# Altium PCB bms_afe-1_1.PcbDoc (part 2 of 2)
Units mm, origin at the board's own origin, x right, y up, seen from the top; angles counter-clockwise.
Board outline 368 x 57.35 mm, 4 copper layers (L1, L2, L3, L4), stack 1.586 mm thick; 218 components, 120 nets, 515 pads, 192 vias.
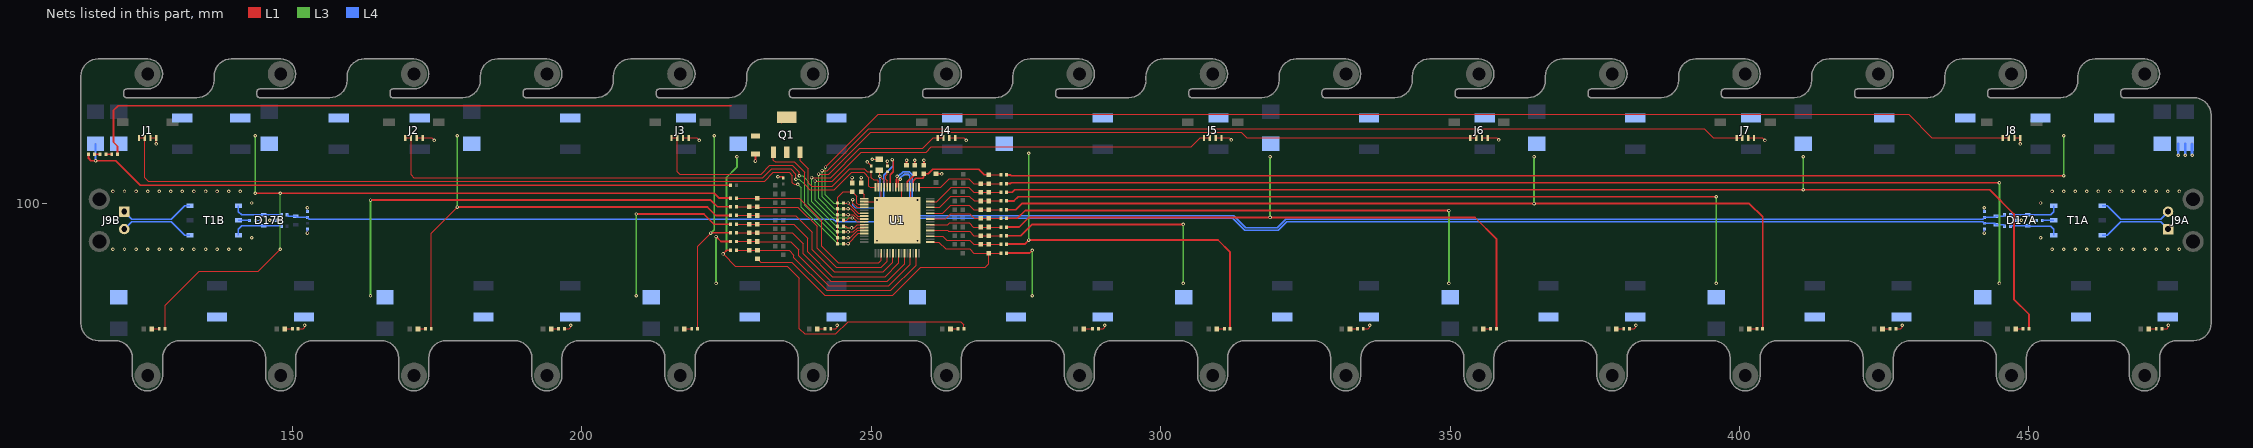
[diagram p4: the nets of this part, all layers, seen from the top]

## Via types
v1: diameter 0.6, hole 0.3, L1 to L4, 192 vias

## Nets (pads, with @x,y where several pads share a name; then routed paths per layer and width w, separated by ;. In a path a pad name is that pad's centre, name@x,y a point inside that pad or via, vN(x,y) a via of type N, cw(c..) or ccw(c..) an arc to the next point about the centre after c; other vN are vias at no path point) (continued)
COMH._P: C48B.1 R80B.1 R81B.2 U1.43 | length 119.6
  L1 w0.218: U1.43@253.25,102.7 253.291,102.741 253.291,104.882 253.8,105.391 253.8,107.4 253.7,107.5 v1(253.634,107.5)
  L4 w0.218: R80B.1@149.1,98 149.35,97.75 R81B.2@150.6,97.75 150.85,97.5 C48B.1@152.6,97.5 152.891,97.209 243.473,97.209 243.964,96.718 251.018,96.718 252.2,97.9 252.2,104.8 253.8,106.4 253.8,107.334 v1(253.634,107.5)
COML._N: C49A.1 R81A.1 R82A.1 U1.41 | length 202.1
  L1 w0.218: U1.41@254.25,102.7 254.291,102.741 254.291,103.982 254.441,104.132 254.441,104.332 254.47,104.36 v1(254.47,104.63)
  L4 w0.218: v1(254.47,104.63) 254.704,104.63 255.492,105.418 256.555,105.418 257.1,104.873 257.1,99 258.3,97.8 312.6,97.8 314.7,95.7 320.127,95.7 321.636,97.209 442.009,97.209 C49A.1@442.3,97.5 444.05,97.5 R81A.1@444.3,97.75 445.55,97.75 R82A.1@445.8,98
COML._P: C48A.1 R80A.1 R81A.2 U1.40 | length 201.3
  L1 w0.218: U1.40@254.75,102.7 254.709,102.741 254.709,103.809 v1(255,104.1)
  L4 w0.218: v1(255,104.1) 255,104.335 255.665,105 256.382,105 256.682,104.7 256.682,98.827 258.127,97.382 312.427,97.382 314.527,95.282 320.3,95.282 321.809,96.791 442.009,96.791 C48A.1@442.3,96.5 444.05,96.5 R81A.2@444.3,96.25 445.55,96.25 R80A.1@445.8,96
COMMA_N: J9A.2 T1A.4 | length 12.8
  L4 w0.218: T1A.4@462.691,99.54 463.56,99.54 465.891,97.209 472.744,97.209 J9A.2@474.035,98.5
COMMA_P: J9A.1 T1A.6 | length 12.8
  L4 w0.218: T1A.6@462.691,94.46 463.56,94.46 465.891,96.791 472.744,96.791 J9A.1@474.035,95.5
COMMB_N: J9B.2 T1B.4 | length 12.8
  L4 w0.218: J9B.2@120.965,95.5 122.256,96.791 129.109,96.791 131.44,94.46 T1B.4@132.309,94.46
COMMB_P: J9B.1 T1B.6 | length 12.8
  L4 w0.218: J9B.1@120.965,98.5 122.256,97.209 129.109,97.209 131.44,99.54 T1B.6@132.309,99.54
CVDD: C43.1 U1.45 U1.52 | length 17.5
  L1 w0.2: v1(246.8,100.6) 246.8,100 247.55,99.25 U1.52@248.8,99.25 ; C43.1@251.4,105.65 251.5,105.55 v1(251.5,104.6) 252.25,103.85 U1.45@252.25,102.7
  L4 w0.2: v1(246.8,100.6) 246.8,99.6 247.2,99.2 251.4,99.2 251.6,99.4 251.6,104.119 251.5,104.219 v1(251.5,104.6)
DVDD: C39.1 U1.49 | length 1.4
  L1 w0.2: C39.1@248.3,101.95 248.8,101.45 U1.49@248.8,100.75
FUSED0: F18.2 R77.1 R78.2 R79.1 | length 189.6
  L1 w0.3: R77.1@273.4,104.85 274.05,104.85 274.2,104.7 v1(456,104.7)
  L3 w0.3: v1(456,104.7) v1(456,111.6)
FUSED1: F17.2 R73.1 R74.1 R75.2 R76.1 | length 190.6
  L1 w0.2: R74.1@473,78.25 473.85,78.25 474.1,78.5 v1(474.1,78.9)
  L1 w0.3: R73.1@273.4,103.35 274.05,103.35 274.2,103.5 v1(444.9,103.5)
  L3 w0.3: v1(444.9,86.1) v1(444.9,103.5)
FUSED2: F16.2 R69.1 R70.1 R71.2 R72.1 | length 202.6
  L1 w0.3: R69.1@273.4,101.85 274.35,101.85 274.8,102.3 v1(411,102.3) 443.2,102.3 447.4,98.1 447.4,83.4 450,80.8 R70.1@450,78.25
  L3 w0.3: v1(411,102.3) v1(411,108)
FUSED3: F15.2 R61.1 R62.1 R66.2 R68.1 | length 139.5
  L1 w0.2: R62.1@427,78.25 427.85,78.25 428.1,78.5 v1(428.1,78.9)
  L1 w0.3: R61.1@273.4,100.35 274.65,100.35 275.4,101.1 v1(396,101.1)
  L3 w0.3: v1(396,86.1) v1(396,101.1)
FUSED4: F14.2 R57.1 R58.1 R59.2 R60.1 | length 159.4
  L1 w0.3: R57.1@273.4,98.85 274.95,98.85 276,99.9 v1(364.5,99.9) 401.7,99.9 404,97.6 R58.1@404,78.25
  L3 w0.3: v1(364.5,99.9) v1(364.5,108)
FUSED5: F13.2 R53.1 R54.1 R55.2 R56.1 | length 91.2
  L1 w0.2: R54.1@381,78.25 381.85,78.25 382.1,78.5 v1(382.1,78.9)
  L1 w0.3: R53.1@273.4,97.35 275.25,97.35 276.6,98.7 v1(349.8,98.7)
  L3 w0.3: v1(349.8,86.1) v1(349.8,98.7)
FUSED6: F12.2 R49.1 R50.1 R51.2 R52.1 | length 112.9
  L1 w0.3: R49.1@273.4,95.85 275.55,95.85 277.2,97.5 v1(318.9,97.5) 354.3,97.5 358,93.8 R50.1@358,78.25
  L3 w0.3: v1(318.9,97.5) v1(318.9,108)
FUSED7: F11.2 R45.1 R46.1 R47.2 R48.1 | length 43.1
  L1 w0.2: R46.1@335,78.25 335.85,78.25 336.1,78.5 v1(336.1,78.9)
  L1 w0.3: R45.1@273.4,94.35 275.85,94.35 277.8,96.3 v1(303.9,96.3)
  L3 w0.3: v1(303.9,86.1) v1(303.9,96.3)
FUSED8: F10.2 R33.1 R34.1 R39.2 R44.1 | length 68
  L1 w0.3: R33.1@273.4,92.9 276.5,92.9 v1(277.2,93.6) 309.9,93.6 312,91.5 R34.1@312,78.25
  L3 w0.3: v1(277.2,93.6) v1(277.2,108.6)
FUSED9: F9.2 R29.1 R30.1 R31.2 R32.1 | length 14
  L1 w0.2: R30.1@289.25,78.25 290.1,78.25 290.35,78.5 v1(290.35,78.9)
  L1 w0.3: R29.1@273.4,91.35 277.35,91.35 v1(277.8,91.8)
  L3 w0.3: v1(277.8,84) v1(277.8,91.8)
FUSED10: F8.2 R25.1 R26.1 R27.2 R28.1 | length 73.6
  L1 w0.2: v1(224.4,91.2) 226.5,89.1 235.5,89.1 237.6,87 237.6,78.3 238.5,77.4 243.9,77.4 246,79.5 265.5,79.5 266,79 R26.1@266,78.25
  L1 w0.3: v1(224.4,91.2) 225.05,91.85 R25.1@225.7,91.85
  L3 w0.3: v1(224.4,91.2) 225,91.8 225,104.4 226.8,106.2 v1(226.8,108)
FUSED11: F7.2 R21.1 R22.1 R23.2 R24.1 | length 12.6
  L1 w0.2: R22.1@243,78.25 243.85,78.25 244.1,78.5 v1(244.1,78.9)
  L1 w0.3: v1(223.2,94.2) 224.05,93.35 R21.1@225.7,93.35
  L3 w0.3: v1(223.2,86.1) v1(223.2,94.2)
FUSED12: F6.2 R17.1 R18.1 R19.2 R20.1 | length 38
  L1 w0.2: R18.1@220,78.25 220,92.5 v1(222.3,94.8)
  L1 w0.3: v1(222.3,94.8) 222.35,94.85 R17.1@225.7,94.85
  L3 w0.3: v1(222.3,94.8) 222.9,95.4 v1(222.9,111.6)
FUSED13: F5.2 R13.1 R14.1 R15.2 R16.1 | length 32.7
  L1 w0.2: R14.1@197,78.25 197.85,78.25 198.1,78.5 v1(198.1,78.9)
  L1 w0.3: v1(209.4,98.1) 221.1,98.1 222.85,96.35 R13.1@225.7,96.35
  L3 w0.3: v1(209.4,84) v1(209.4,98.1)
FUSED14: F4.2 R9.1 R10.1 R11.2 R12.1 | length 83
  L1 w0.2: R10.1@174,78.25 174,94.8 v1(178.5,99.3)
  L1 w0.3: v1(178.5,99.3) 221.7,99.3 223.15,97.85 R9.1@225.7,97.85
  L3 w0.3: v1(178.5,99.3) v1(178.5,111.6)
FUSED15: F3.2 R5.1 R6.1 R7.2 R8.1 | length 80.8
  L1 w0.2: R6.1@151,78.25 151.85,78.25 152.1,78.5 v1(152.1,78.9)
  L1 w0.3: v1(163.5,100.5) 222.3,100.5 223.45,99.35 R5.1@225.7,99.35
  L3 w0.3: v1(163.5,84) v1(163.5,100.5)
FUSED16: F2.2 R1.1 R2.1 R3.2 R4.1 | length 130
  L1 w0.2: R2.1@128,78.25 128,82.3 133.9,88.2 144.1,88.2 v1(147.9,92)
  L1 w0.3: v1(143.6,101.7) v1(147.9,101.7) 222.9,101.7 223.75,100.85 R1.1@225.7,100.85
  L3 w0.2: v1(147.9,92) v1(147.9,101.7)
  L3 w0.3: v1(143.6,101.7) v1(143.6,111.6)
GND: C18.2 C31.2 C32.2 C34.2 C36.2 C39.2 C40.2 C41.2 C42.2 C43.2 C44.2 C45A.2 C45B.2 C48A.2 C48B.2 C49A.2 C49B.2 D17A.3 D17B.3 F19.2 J1.1 J1.2 J2.1 J2.2 J3.1 J3.2 J4.1 J4.2 J5.1 J5.2 J6.1 J6.2 J7.1 J7.2 J8.1 J8.2 U1.36 U1.39 U1.46 U1.50 U1.EP0 | length 52.5
  L1 w0.2: J1.2@125.5,111.25 J1.1@126.5,111.25 v1(126.5,110.2) ; J2.2@171.5,111.25 J2.1@172.5,111.25 174.05,111.25 v1(174.5,110.8) ; J3.2@217.5,111.25 J3.1@218.5,111.25 219.85,111.25 v1(220.3,110.8) ; C18.2@246.7,103.45 v1(246.7,104.4) ; C39.2@248.3,103.45 v1(248.3,104.4) ; U1.50@248.8,100.25 U1.EP0@250.65,100.25 ; v1(249.3,107.1) C34.2@250,106.4 ; v1(250.189,107.554) 250.193,107.55 C43.2@251.4,107.55 ; U1.EP0@251.75,100.85 U1.46@251.75,102.7 ; C41.2@252.8,106.4 v1(252.8,107.2) ; U1.EP0@255.25,100.9 U1.39@255.25,102.7 ; U1.36@256.75,102.7 256.8,102.65 U1.EP0@256.8,100.9 ; J4.2@263.5,111.25 J4.1@264.5,111.25 265.95,111.25 v1(266.4,110.8) ; J5.2@309.5,111.25 J5.1@310.5,111.25 311.85,111.25 v1(312.2,110.9) ; J6.2@355.5,111.25 J6.1@356.5,111.25 358.05,111.25 v1(358.4,110.9) ; J7.2@401.5,111.25 J7.1@402.5,111.25 403.95,111.25 v1(404.4,110.8) ; J8.2@447.5,111.25 J8.1@448.5,111.25 v1(448.5,110.2)
  L1 w0.3: v1(230,107.25) C31.2@230,108.45 ; v1(233.882,104.538) 233.893,104.55 234.8,104.55 ; C40.2@256.1,106.55 v1(256.1,107.4) ; C36.2@257.5,106.55 v1(257.5,107.4) ; C42.2@259.1,106.55 v1(259.1,107.4) ; C44.2@261.2,105.05 262.142,105.05 v1(262.162,105.03)
  L4 w0.2: C45B.2@143.6,97 v1(144.5,97) ; v1(152.6,94.8) C49B.2@152.6,95.5 ; C48B.2@152.6,98.5 v1(152.6,99.2) ; v1(442.3,94.8) C48A.2@442.3,95.5 ; C49A.2@442.3,98.5 v1(442.3,99.2) ; v1(450.5,97) C45A.2@451.3,97
  L4 w0.3: v1(146.1,97) D17B.3@147.125,97 ; D17A.3@447.775,97 v1(448.7,97)
  L4 w0.5: v1(475.8,108.25) F19.2@475.8,110.2 ; v1(477,108.25) F19.2@477,110.2 ; v1(478.2,108.25) F19.2@478.2,110.2
  other v1: 119,92 121,92 123,92 125,92 127,92 129,92 131,92 133,92 135,92 137,92 139,92 141,92 454,92 456,92 458,92 460,92 462,92 464,92 466,92 468,92 470,92 472,92 474,92 476,92 251,93.5 258,93.5 143,94 452,94 254.5,97 143,100 452,100 251,100.5 258,100.5 119,102 121,102 123,102 125,102 127,102 129,102 131,102 133,102 135,102 137,102 139,102 141,102 454,102 456,102 458,102 460,102 462,102 464,102 466,102 468,102 470,102 472,102 474,102 476,102
GPIO1: J1.3 J1.4 R35.2 U1.61 | length 142.3
  L1 w0.2: J1.4@123.5,111.25 J1.3@124.5,111.25 124.5,104.4 125.1,103.8 231.6,103.8 233.1,105.3 235.8,105.3 236.4,104.7 236.4,103.5 236.7,103.2 v1(237.3,103.2) ; R35.2@245.2,93 v1(246,93) 247.75,94.75 U1.61@248.8,94.75
  L3 w0.2: v1(237.3,103.2) 237.9,102.6 237.9,99.3 244.2,93 v1(246,93)
GPIO2: J2.3 J2.4 R40.2 U1.60 | length 95.4
  L1 w0.2: J2.4@169.5,111.25 J2.3@170.5,111.25 170.5,104.9 171,104.4 231.3,104.4 232.8,105.9 236.1,105.9 237,105 v1(237,104.1) ; R40.2@245.2,94 v1(246,94) 246.4,94 247.65,95.25 U1.60@248.8,95.25
  L3 w0.2: v1(237,104.1) 237.6,104.1 238.5,103.2 238.5,99.6 244.1,94 v1(246,94)
GPIO3: J3.3 J3.4 R36.2 U1.59 | length 48.5
  L1 w0.2: J3.4@215.5,111.25 J3.3@216.5,111.25 216.5,105.4 216.9,105 231,105 232.5,106.5 236.4,106.5 237.6,105.3 v1(237.6,104.7) ; R36.2@245.2,95 v1@245.991,95 ; v1(246,95) v1@245.991,95 ; U1.59@248.8,95.75 247.65,95.75 246.9,95 v1@245.991,95
  L3 w0.2: v1(237.6,104.7) 238.2,104.7 239.1,103.8 239.1,99.9 244,95 v1(246,95)
GPIO4: J4.3 J4.4 R41.2 U1.58 | length 42.6
  L1 w0.2: v1(239.7,104.4) 243,104.4 248.05,109.45 258.9,109.45 260.7,111.25 J4.4@261.5,111.25 J4.3@262.5,111.25 ; R41.2@245.2,96 245.6,96 245.9,95.7 v1(246.6,95.7) 247.05,95.7 247.6,96.25 U1.58@248.8,96.25
  L3 w0.2: v1(239.7,104.4) 239.7,100.2 244.2,95.7 v1(246.6,95.7)
GPIO5: J5.3 J5.4 R37.2 U1.57 | length 86.4
  L1 w0.2: v1(240.3,103.8) 243.3,103.8 248.3,108.8 259.5,108.8 260.4,109.7 305.3,109.7 306.85,111.25 J5.3@308.5,111.25 ; R37.2@245.2,97 245.8,97 246.211,97.411 v1(246.711,97.411) 246.8,97.5 246.85,97.5 247.6,96.75 U1.57@248.8,96.75
  L3 w0.2: v1(240.3,103.8) 240.3,100.5 243.389,97.411 v1(246.711,97.411)
GPIO6: J6.3 J6.4 R42.2 U1.56 | length 131.4
  L1 w0.2: v1(240.9,105) 242.7,105 249.9,112.2 313.9,112.2 314.85,111.25 J6.4@353.5,111.25 J6.3@354.5,111.25 ; R42.2@245.2,98 v1@246.05,98 ; v1(246,98) v1@246.05,98 ; U1.56@248.8,97.25 247.65,97.25 246.9,98 v1@246.05,98
  L3 w0.2: v1(240.9,105) 240.9,100.8 243.7,98 v1(246,98)
GPIO7: J7.3 J7.4 R38.2 U1.55 | length 176.6
  L1 w0.2: v1(241.5,105.6) 242.4,105.6 249.6,112.8 393.9,112.8 395.45,111.25 J7.4@399.5,111.25 J7.3@400.5,111.25 ; R38.2@245.2,99 v1(246,99) 246.45,99 247.7,97.75 U1.55@248.8,97.75
  L3 w0.2: v1(241.5,105.6) 241.5,101.1 243.6,99 v1(246,99)
GPIO8: J8.3 J8.4 R43.2 U1.54 | length 223.5
  L1 w0.2: v1(242.1,106.2) 251.2,115.3 429.2,115.3 433.25,111.25 J8.4@445.5,111.25 J8.3@446.5,111.25 ; R43.2@245.2,100 v1(246,100) 247.75,98.25 U1.54@248.8,98.25
  L3 w0.2: v1(242.1,106.2) 242.1,101.4 243.5,100 v1(246,100)
LDOIN: C34.1 Q1.3 U1.47 | length 22
  L1 w0.2: Q1.3@237.7,108.8 237.7,107.3 239.1,105.9 239.1,103.5 239.7,102.9 243.3,102.9 246.3,105.9 248.8,105.9 249.3,105.4 C34.1@250,105.4 250,104.4 250.4,104 251,104 251.25,103.75 U1.47@251.25,102.7
NEG5V: C41.1 U1.44 | length 2.9
  L1 w0.2: U1.44@252.75,102.7 252.75,103.85 252.5,104.1 252.5,104.7 252.8,105 C41.1@252.8,105.4
NetC45A_1: C45A.1 T1A.2 | length 2
  L4 w0.218: C45A.1@452.3,97 T1A.2@454.309,97
NetC45B_1: C45B.1 T1B.2 | length 1.9
  L4 w0.218: T1B.2@140.691,97 C45B.1@142.6,97
NetD1_1: D1.1 R2.2 | length 1.3
  L1 w0.2: D1.1@125.7,78.25 R2.2@127,78.25
NetD2_1: D2.1 R6.2 | length 1.3
  L1 w0.2: D2.1@148.7,78.25 R6.2@150,78.25
NetD3_1: D3.1 R10.2 | length 1.3
  L1 w0.2: D3.1@171.7,78.25 R10.2@173,78.25
NetD4_1: D4.1 R14.2 | length 1.3
  L1 w0.2: D4.1@194.7,78.25 R14.2@196,78.25
NetD5_1: D5.1 R18.2 | length 1.3
  L1 w0.2: D5.1@217.7,78.25 R18.2@219,78.25
NetD6_1: D6.1 R22.2 | length 1.3
  L1 w0.2: D6.1@240.7,78.25 R22.2@242,78.25
NetD7_1: D7.1 R26.2 | length 1.3
  L1 w0.2: D7.1@263.7,78.25 R26.2@265,78.25
NetD8_1: D8.1 R30.2 | length 1.6
  L1 w0.2: D8.1@286.7,78.25 R30.2@288.25,78.25
NetD9_1: D9.1 R34.2 | length 1.3
  L1 w0.2: D9.1@309.7,78.25 R34.2@311,78.25
NetD10_1: D10.1 R46.2 | length 1.3
  L1 w0.2: D10.1@332.7,78.25 R46.2@334,78.25
NetD11_1: D11.1 R50.2 | length 1.3
  L1 w0.2: D11.1@355.7,78.25 R50.2@357,78.25
NetD12_1: D12.1 R54.2 | length 1.3
  L1 w0.2: D12.1@378.7,78.25 R54.2@380,78.25
NetD13_1: D13.1 R58.2 | length 1.3
  L1 w0.2: D13.1@401.7,78.25 R58.2@403,78.25
NetD14_1: D14.1 R62.2 | length 1.3
  L1 w0.2: D14.1@424.7,78.25 R62.2@426,78.25
NetD15_1: D15.1 R70.2 | length 1.3
  L1 w0.2: D15.1@447.7,78.25 R70.2@449,78.25
NetD16_1: D16.1 R74.2 | length 1.3
  L1 w0.2: D16.1@470.7,78.25 R74.2@472,78.25
NetD17A_1: D17A.1 R82A.2 T1A.3 | length 8.8
  L4 w0.218: R82A.2@446.8,98 446.85,97.95 D17A.1@449.825,97.95 453.75,97.95 454.309,98.509 T1A.3@454.309,99.54
NetD17A_2: D17A.2 R80A.2 T1A.1 | length 8.8
  L4 w0.218: R80A.2@446.8,96 446.85,96.05 D17A.2@449.825,96.05 449.875,96 453.8,96 454.309,95.491 T1A.1@454.309,94.46
NetD17B_1: D17B.1 R82B.2 T1B.3 | length 8.7
  L4 w0.218: T1B.3@140.691,94.46 140.691,95.491 141.25,96.05 D17B.1@145.075,96.05 148.05,96.05 R82B.2@148.1,96
NetD17B_2: D17B.2 R80B.2 T1B.1 | length 8.7
  L4 w0.218: T1B.1@140.691,99.54 140.691,98.509 141.25,97.95 D17B.2@145.075,97.95 148.05,97.95 R80B.2@148.1,98
NetF1_2: F1.2 R63.2 R67.1 | length 116.5
  L1 w0.3: R63.2@114.8,108.4 114.8,107.7 115.2,107.3 v1(116,107.3) 119.5,107.3 123.75,103.05 R67.1@225.7,103.05
  L4 w0.3: v1(116,107.3) F1.2@116,110.25
NetR63_1: R63.1 R64.2 | length 1
  L1 w0.3: R63.1@115.8,108.4 R64.2@116.8,108.4
NetR64_1: R64.1 R65.2 | length 1
  L1 w0.3: R64.1@117.8,108.4 R65.2@118.8,108.4
NPNB: Q1.1 U1.48 | length 25.6
  L1 w0.2: Q1.1@233.1,108.8 233.1,107.4 233.4,107.1 236.7,107.1 238.5,105.3 238.5,103.2 239.4,102.3 243.6,102.3 246.6,105.3 248.7,105.3 249.6,104.4 249.6,102.9 249.8,102.7 U1.48@250.75,102.7
NPNC: C31.1 Q1.2 Q1.4 R65.1 | length 116.2
  L1 w0.3: R65.1@119.8,108.4 119.8,109.8 119.1,110.5 119.1,116 119.9,116.8 225.8,116.8 ; Q1.4@234.5,113.9 Q1.4@235.4,114.8
REFHP: C36.1 U1.37 | length 2.9
  L1 w0.218: U1.37@256.25,102.7 256.25,103.65 257.5,104.9 C36.1@257.5,105.05
TSREF: C18.1 R35.1 R36.1 R37.1 R38.1 R40.1 R41.1 R42.1 R43.1 U1.51 | length 14.6
  L1 w0.2: R35.1@244.2,93 R40.1@244.2,94 R36.1@244.2,95 R41.1@244.2,96 R37.1@244.2,97 R42.1@244.2,98 R38.1@244.2,99 R43.1@244.2,100 244.2,101 245.15,101.95 C18.1@246.7,101.95 247.5,101.15 247.5,100 247.75,99.75 U1.51@248.8,99.75
VC0: C37.2 C42.1 R77.2 U1.35 | length 17.8
  L1 w0.2: C37.2@270.3,104.85 R77.2@272.4,104.85
  L1 w0.218: U1.35@257.25,102.7 257.25,103.85 257.709,104.309 258.909,104.309 259.1,104.5 C42.1@259.1,105.05 259.85,105.05 260.6,105.8 268.6,105.8 269.55,104.85 C37.2@270.3,104.85
VC1: C33.2 C37.1 R73.2 U1.33 | length 15.1
  L1 w0.2: U1.33@258.25,102.7 262,102.7 263.5,104.2 266.85,104.2 267.7,103.35 C33.2@268.9,103.35 C37.1@270.3,103.35 R73.2@272.4,103.35
VC2: C28.2 C33.1 R69.2 U1.31 | length 13.6
  L1 w0.2: U1.31@260.2,100.25 261.35,100.25 263.8,102.7 266.85,102.7 267.7,101.85 C33.1@268.9,101.85 C28.2@270.3,101.85 R69.2@272.4,101.85
VC3: C26.2 C28.1 R61.2 U1.29 | length 13.4
  L1 w0.2: U1.29@260.2,99.25 261.8,99.25 263.75,101.2 266.95,101.2 267.8,100.35 C26.2@268.9,100.35 C28.1@270.3,100.35 R61.2@272.4,100.35
VC4: C24.2 C26.1 R57.2 U1.27 | length 13.1
  L1 w0.2: U1.27@260.2,98.25 262.35,98.25 263.7,99.6 266.95,99.6 267.7,98.85 C26.1@268.9,98.85 C24.2@270.3,98.85 R57.2@272.4,98.85
VC5: C22.2 C24.1 R53.2 U1.25 | length 12.9
  L1 w0.2: U1.25@260.2,97.25 262.85,97.25 263.7,98.1 267.05,98.1 267.8,97.35 C22.2@268.9,97.35 C24.1@270.3,97.35 R53.2@272.4,97.35
VC6: C20.2 C22.1 R49.2 U1.23 | length 12.7
  L1 w0.2: U1.23@260.2,96.25 263.25,96.25 263.6,96.6 266.9,96.6 267.65,95.85 C22.1@268.9,95.85 C20.2@270.3,95.85 R49.2@272.4,95.85
VC7: C17.2 C20.1 R45.2 U1.21 | length 12.6
  L1 w0.2: U1.21@260.2,95.25 263.2,95.25 263.35,95.1 267,95.1 267.75,94.35 C17.2@268.9,94.35 C20.1@270.3,94.35 R45.2@272.4,94.35
VC8: C15.2 C17.1 R33.2 U1.19 | length 12.8
  L1 w0.2: U1.19@260.2,94.25 262.4,94.25 263.05,93.6 267,93.6 267.75,92.85 C17.1@268.9,92.85 C15.2@270.3,92.85 270.35,92.9 R33.2@272.4,92.9
VC9: C13.2 C15.1 R29.2 U1.17 | length 59.6
  L1 w0.2: C13.2@230.35,90.35 230.9,89.8 236.278,89.8 241.978,84.1 253.723,84.1 258.523,88.9 269.7,88.9 270.3,89.5 C15.1@270.3,91.35 ; U1.17@260.2,93.25 261.7,93.25 262.85,92.1 267,92.1 267.75,91.35 C15.1@270.3,91.35 ; R29.2@272.4,91.35 C15.1@270.3,91.35
VC10: C11.2 C13.1 R25.2 U1.15 | length 38
  L1 w0.2: R25.2@226.7,91.85 C11.2@228.9,91.85 228.95,91.8 230.35,91.8 235.8,91.8 236.65,90.95 236.65,90.56 242.31,84.9 253.391,84.9 257.75,89.259 U1.15@257.75,91.3
VC11: C9.2 C11.1 R21.2 U1.13 | length 37.3
  L1 w0.2: R21.2@226.7,93.35 C11.1@228.9,93.35 C9.2@230.3,93.35 230.35,93.3 236.1,93.3 237.45,91.95 237.45,90.891 242.641,85.7 253.06,85.7 256.75,89.39 U1.13@256.75,91.3
VC12: C7.2 C9.1 R17.2 U1.11 | length 36.6
  L1 w0.2: R17.2@226.7,94.85 C7.2@228.9,94.85 C9.1@230.3,94.85 236.35,94.85 238.25,92.95 238.25,91.222 242.972,86.5 252.728,86.5 255.75,89.522 U1.11@255.75,91.3
VC13: C5.2 C7.1 R13.2 U1.9 | length 35.8
  L1 w0.2: R13.2@226.7,96.35 C7.1@228.9,96.35 C5.2@230.3,96.35 236.65,96.35 239.05,93.95 239.05,91.554 243.304,87.3 252.397,87.3 254.75,89.653 U1.9@254.75,91.3
VC14: C3.2 C5.1 R9.2 U1.7 | length 35.1
  L1 w0.2: R9.2@226.7,97.85 C3.2@228.9,97.85 C5.1@230.3,97.85 230.35,97.8 237,97.8 239.85,94.95 239.85,91.885 243.635,88.1 252.066,88.1 253.75,89.784 U1.7@253.75,91.3
VC15: C1.2 C3.1 R5.2 U1.5 | length 34.4
  L1 w0.2: R5.2@226.7,99.35 C3.1@228.9,99.35 C1.2@230.3,99.35 230.35,99.3 237.3,99.3 240.65,95.95 240.65,92.217 243.967,88.9 251.7,88.9 252.75,89.95 U1.5@252.75,91.3
VC16: C1.1 R1.2 U1.3 | length 33.6
  L1 w0.2: R1.2@226.7,100.85 C1.1@230.3,100.85 230.35,100.8 237.6,100.8 241.45,96.95 241.45,92.548 244.298,89.7 251.3,89.7 251.75,90.15 U1.3@251.75,91.3
pads on no net: J1.EP0 J1.EP1 J2.EP0 J2.EP1 J3.EP0 J3.EP1 J4.EP0 J4.EP1 J5.EP0 J5.EP1 J6.EP0 J6.EP1 J7.EP0 J7.EP1 J8.EP0 J8.EP1 J9A.3 J9A.4 J9B.3 J9B.4 T1A.5 T1B.5 U1.53 U1.62 U1.63 U1.64

## Polygon pours and split planes (outlines as drawn)
CB16 on L4 "NONET_L04_P-001" (solid, remove dead copper, pour order 99): 144,110.5 144,102.5 113.515,102.5 113.515,107 129,107 129,110.5
CB15 on L4 "NONET_L04_P-001" (solid, remove dead copper, pour order 79): 135,85 135,87 113.515,87 113.515,91.5 144.033,91.5 144.039,94.5 164,94.5 164,85
CB1 on L4 "NONET_L04_P-001" (solid, remove dead copper, pour order 63): 440.5,87 440.5,94.5 451.543,94.5 451.543,91.5 480.5,91.5 480.5,85 457,85 457,87
CB0 on L4 "NONET_L04_P-001" (solid, remove dead copper, pour order 61): 442,110.5 465,110.5 465,107 480.397,107 480.397,102.5 451.543,102.5 451.543,99.5 442,99.5
CELL0 on L4 "CELL0_L04_P059" (solid, remove dead copper, pour order 59): 478.469,124.895 455.7,124.895 455.7,116.5 478.469,116.5
CELL16 on L4 "CELL16_L04_P058" (solid, remove dead copper, pour order 58): 127.615,124.895 113.469,124.895 113.469,116.5 127.615,116.5
CELL14 on L4 "CELL14_L04_P057" (solid, remove dead copper, pour order 57): 173.615,124.895 133.635,124.895 133.635,116.5 173.615,116.5
CELL12 on L4 "CELL12_L04_P056" (solid, remove dead copper, pour order 56): 219.615,124.895 179.635,124.895 179.635,116.5 219.615,116.5
CELL10 on L4 "CELL10_L04_P055" (solid, remove dead copper, pour order 55): 265.615,124.895 225.635,124.895 225.635,116.5 265.615,116.5
CELL8 on L4 "CELL8_L04_P054" (solid, remove dead copper, pour order 54): 311.615,124.895 271.635,124.895 271.635,116.5 311.615,116.5
CELL6 on L4 "CELL6_L04_P053" (solid, remove dead copper, pour order 53): 357.615,124.895 317.635,124.895 317.635,116.5 357.615,116.5
CELL4 on L4 "CELL4_L04_P052" (solid, remove dead copper, pour order 52): 403.6,124.895 363.62,124.895 363.62,116.5 403.6,116.5
CELL2 on L4 "CELL2_L04_P051" (solid, remove dead copper, pour order 51): 449.615,124.895 409.635,124.895 409.635,116.5 449.615,116.5
CELL1 on L4 "CELL1_L04_P050" (solid, remove dead copper, pour order 50): 476,78 441,78 441,67.499 476,67.499
CELL3 on L4 "CELL3_L04_P049" (solid, remove dead copper, pour order 49): 430,78 395,78 395,67.499 430,67.499
CELL5 on L4 "CELL5_L04_P048" (solid, remove dead copper, pour order 48): 384,78 349,78 349,67.499 384,67.499
CELL7 on L4 "CELL7_L04_P047" (solid, remove dead copper, pour order 47): 338,78 303,78 303,67.499 338,67.499
CELL9 on L4 "CELL9_L04_P046" (solid, remove dead copper, pour order 46): 292,78 257,78 257,67.499 292,67.499
CELL11 on L4 "CELL11_L04_P045" (solid, remove dead copper, pour order 45): 246,78 211,78 211,67.499 246,67.499
CELL13 on L4 "CELL13_L04_P044" (solid, remove dead copper, pour order 44): 200,78 165,78 165,67.499 200,67.499
CELL15 on L4 "CELL15_L04_P017" (solid, remove dead copper, pour order 17): 154,78 119,78 119,67.499 154,67.499
FUSED0 on L4 "NONET_L04_P-001" (solid, remove dead copper, pour order 60): 474.5,114 471,114 471,116 442,116 442,111 465.5,111 465.5,107.5 474.5,107.5
CB10 on L4 "NONET_L04_P-001" (solid, remove dead copper, pour order 91): 240.476,110.5 240.476,107 225.5,107 225.5,99.5 271,99.5 271,110.5
CB4 on L4 "NONET_L04_P-001" (solid, remove dead copper, pour order 81): 380,110.5 380,107 363.5,107 363.5,99.5 409,99.5 409,110.5
FUSED4 on L4 "NONET_L04_P-001" (solid, remove dead copper, pour order 80): 363.5,114 363.5,107.5 379.495,107.5 379.495,111 409,111 409,116 367,116 367,114
CB6 on L4 "NONET_L04_P-001" (solid, remove dead copper, pour order 83): 334,110.5 334,107 317.5,107 317.5,99.5 363,99.5 363,110.5
FUSED6 on L4 "NONET_L04_P-001" (solid, remove dead copper, pour order 82): 317.5,114 317.5,107.5 333.495,107.5 333.495,111 363,111 363,116 321,116 321,114
CB8 on L4 "NONET_L04_P-001" (solid, remove dead copper, pour order 93): 288,110.5 288,107 271.5,107 271.5,99.5 317,99.5 317,110.5
FUSED8 on L4 "NONET_L04_P-001" (solid, remove dead copper, pour order 92): 271.5,114 271.5,107.5 287.495,107.5 287.495,111 317,111 317,116 275,116 275,114
FUSED10 on L4 "NONET_L04_P-001" (solid, remove dead copper, pour order 90): 225.5,114 225.5,107.5 239.969,107.5 239.969,111 271,111 271,116 229,116 229,114
FUSED16 on L4 "NONET_L04_P-001" (solid, remove dead copper, pour order 98): 118.5,114 122,114 122,116 144,116 144,111 128.5,111 128.5,107.5 118.5,107.5
CB14 on L4 "NONET_L04_P-001" (solid, remove dead copper, pour order 97): 156,110.5 156,107 144.5,107 144.5,99.5 179,99.5 179,110.5
FUSED14 on L4 "NONET_L04_P-001" (solid, remove dead copper, pour order 96): 144.5,114 144.5,107.5 155.5,107.5 155.5,111 179,111 179,116 148,116 148,114
CB12 on L4 "NONET_L04_P-001" (solid, remove dead copper, pour order 95): 196,110.5 196,107 179.5,107 179.5,99.5 225,99.5 225,110.5
FUSED12 on L4 "NONET_L04_P-001" (solid, remove dead copper, pour order 94): 179.5,114 179.5,107.5 195.495,107.5 195.495,111 225,111 225,116 183,116 183,114
CB2 on L4 "NONET_L04_P-001" (solid, remove dead copper, pour order 65): 423,110.5 441.5,110.5 441.5,99.5 409.5,99.5 409.5,107 423,107
CB11 on L4 "NONET_L04_P-001" (solid, remove dead copper, pour order 75): 227,85 227,87 210.5,87 210.5,94.5 256,94.5 256,85
FUSED2 on L4 "NONET_L04_P-001" (solid, remove dead copper, pour order 64): 409.5,114 409.5,107.5 422.5,107.5 422.5,111 441.5,111 441.5,116 413,116 413,114
FUSED15 on L4 "NONET_L04_P-001" (solid, remove dead copper, pour order 78): 113.515,80 113.515,86.5 134.495,86.5 134.495,84.5 164,84.5 164,78.5 122,78.5 122,80
CB13 on L4 "NONET_L04_P-001" (solid, remove dead copper, pour order 77): 181,85 181,87 164.5,87 164.5,94.5 210,94.5 210,85
FUSED13 on L4 "NONET_L04_P-001" (solid, remove dead copper, pour order 76): 164.5,80 164.5,86.5 180.495,86.5 180.495,84.5 210,84.5 210,78.5 168,78.5 168,80
FUSED11 on L4 "NONET_L04_P-001" (solid, remove dead copper, pour order 74): 210.5,80 210.5,86.5 226.495,86.5 226.495,84.5 256,84.5 256,78.5 214,78.5 214,80
CB9 on L4 "NONET_L04_P-001" (solid, remove dead copper, pour order 73): 273,85 273,87 256.5,87 256.5,94.5 302,94.5 302,85
FUSED9 on L4 "NONET_L04_P-001" (solid, remove dead copper, pour order 72): 256.5,80 256.5,86.5 272.495,86.5 272.495,84.5 302,84.5 302,78.5 260,78.5 260,80
CB7 on L4 "NONET_L04_P-001" (solid, remove dead copper, pour order 71): 319,85 319,87 302.5,87 302.5,94.5 348,94.5 348,85
FUSED7 on L4 "NONET_L04_P-001" (solid, remove dead copper, pour order 70): 302.5,80 302.5,86.5 318.495,86.5 318.495,84.5 348,84.5 348,78.5 306,78.5 306,80
CB5 on L4 "NONET_L04_P-001" (solid, remove dead copper, pour order 69): 365,85 365,87 348.5,87 348.5,94.5 394,94.5 394,85
FUSED5 on L4 "NONET_L04_P-001" (solid, remove dead copper, pour order 68): 348.5,80 348.5,86.5 364.495,86.5 364.495,84.5 394,84.5 394,78.5 352,78.5 352,80
CB3 on L4 "NONET_L04_P-001" (solid, remove dead copper, pour order 67): 411,85 411,87 394.5,87 394.5,94.5 440,94.5 440,85
FUSED3 on L4 "NONET_L04_P-001" (solid, remove dead copper, pour order 66): 394.5,80 394.5,86.5 410.495,86.5 410.495,84.5 440,84.5 440,78.5 398,78.5 398,80
FUSED1 on L4 "NONET_L04_P-001" (solid, remove dead copper, pour order 62): 440.5,80 440.5,86.5 456.5,86.5 456.5,84.5 480.5,84.5 480.5,78.5 444,78.5 444,80
NPNC on L1 "NPNC_L01_P101" (solid, remove dead copper, pour order 101): 225.5,109.5 231.5,109.5 231.5,110.5 234.5,110.5 234.5,107.5 236.5,107.5 236.5,110.5 245.5,110.5 245.5,118 225.5,118
GND on L2 "NONET_L04_P-001" (solid, remove dead copper, pour order 100): 113.535,118.233 113.509,101.539 140.507,101.485 140.493,92.5 113.475,92.5 113.469,76.2 481.469,76.2 481.469,92.5 454.496,92.5 454.464,101.485 481.469,101.485 481.469,118.2
GND on L3 "NONET_L04_P-001" (solid, remove dead copper, pour order 102): 113.535,118.233 113.509,101.539 140.507,101.485 140.493,92.5 113.475,92.5 113.469,76.2 481.469,76.2 481.469,92.5 454.496,92.5 454.464,101.485 481.469,101.485 481.469,118.2

## Silkscreen, mask and mechanical layers (free items; w line width, h text height)
Top Overlay:
  text "COMM_P" at 122.7,98.067 h1
  text "COMM_N" at 466.7,98.067 h1
  text "COMM_N" at 122.7,95.067 h1
  text "COMM_P" at 466.7,95.067 h1
  text "bms_afe-1_1 / Sasha Zbrozek - zbrozek@zlnp.net / JLC04161H-7628 stackup" at 163,90 h1.52
  text "Cell 15" at 120.254,79.254 h1.52
  text "Cell 14" at 144.254,79.254 h1.52
  text "Cell 13" at 167.254,79.254 h1.52
  text "Cell 12" at 190.254,79.254 h1.52
  text "Cell 11" at 213.254,79.254 h1.52
  text "Cell 10" at 236.254,79.254 h1.52
  text "Cell 9" at 259.254,79.254 h1.52
  text "Cell 8" at 282.254,79.254 h1.52
  text "Cell 7" at 305.254,79.254 h1.52
  text "Cell 6" at 329.254,79.254 h1.52
  text "Cell 5" at 351.254,79.254 h1.52
  text "Cell 4" at 374.254,79.254 h1.52
  text "Cell 3" at 397.254,79.254 h1.52
  text "Cell 2" at 420.254,79.254 h1.52
  text "Cell 1" at 443.254,79.254 h1.52
  text "Cell 0" at 466.254,79.254 h1.52
Bottom Overlay:
  text "COMM_P" at 128.335,98.067 h1
  text "COMM_N" at 472.335,98.067 h1
  text "COMM_N" at 128.335,95.067 h1
  text "COMM_P" at 472.335,95.067 h1
Bottom Solder:
  rectangle: 114,67 481,76.2
  rectangle: 112,118.2 481,126
Mechanical 1:
  lines w0.2: 120.7,112.3 129.3,112.3
Board Shape:
  drawing of 1492 lines, arcs and shapes, not listed

## Text inside footprints (layer, text, board x,y; h text height)
J1: Mechanical 1 "End of Flex Tab" at 128.4,112.1 h0.5 r180
J2: Mechanical 1 "End of Flex Tab" at 174.4,112.1 h0.5 r180
J3: Mechanical 1 "End of Flex Tab" at 220.4,112.1 h0.5 r180
J4: Mechanical 1 "End of Flex Tab" at 266.4,112.1 h0.5 r180
J5: Mechanical 1 "End of Flex Tab" at 312.4,112.1 h0.5 r180
J6: Mechanical 1 "End of Flex Tab" at 358.4,112.1 h0.5 r180
J7: Mechanical 1 "End of Flex Tab" at 404.4,112.1 h0.5 r180
J8: Mechanical 1 "End of Flex Tab" at 450.4,112.1 h0.5 r180